# Altium PCB RaspberryPi3BP-Layout.pcbdoc
Units mil, origin at the board's own origin, x right, y up, seen from the top; angles counter-clockwise.
Board outline 5516.39 x 4732.23 mil, 2 copper layers (Top Layer, Bottom Layer); 18 components, 0 nets, 191 pads, 0 vias.
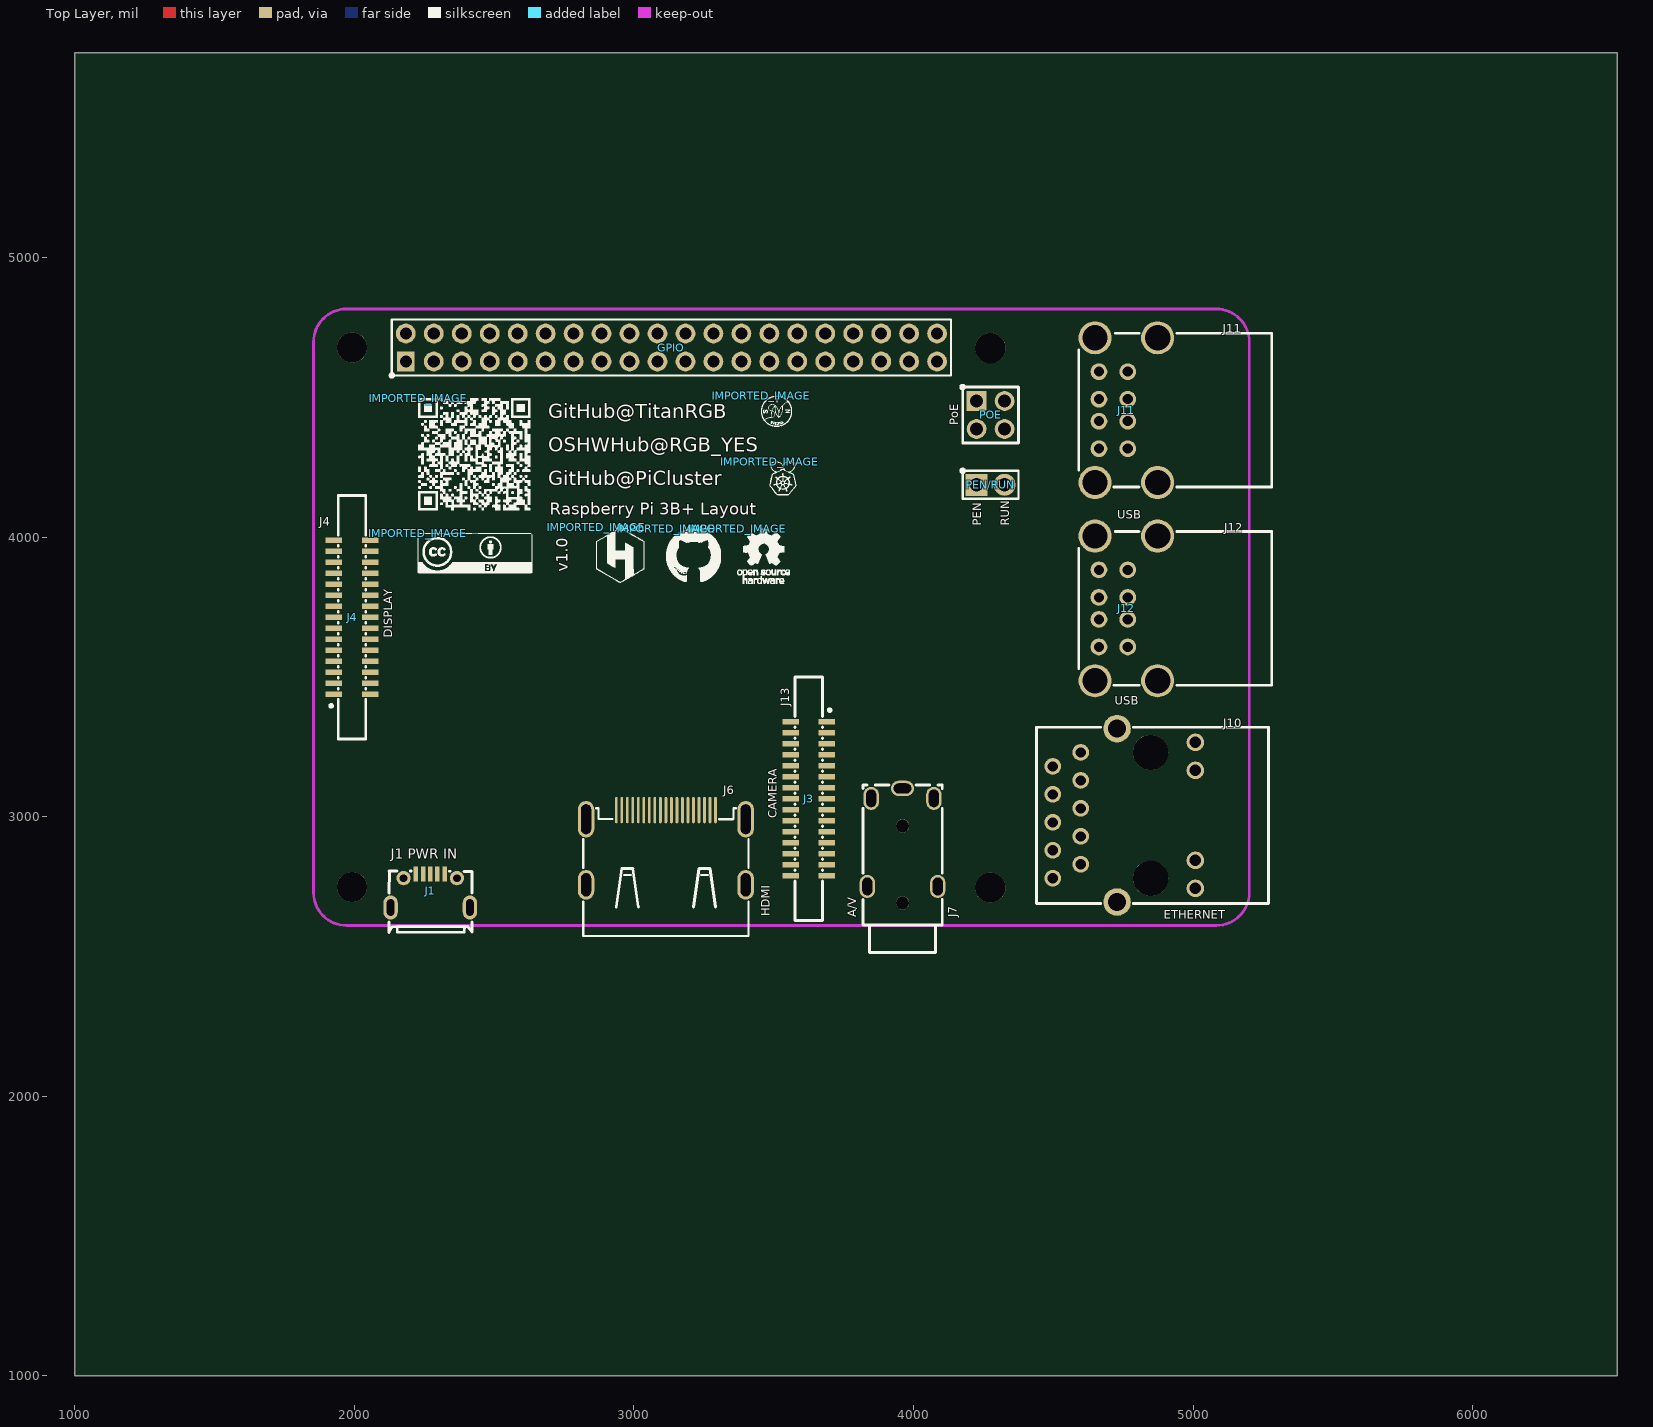
[diagram p0: Top Layer view]
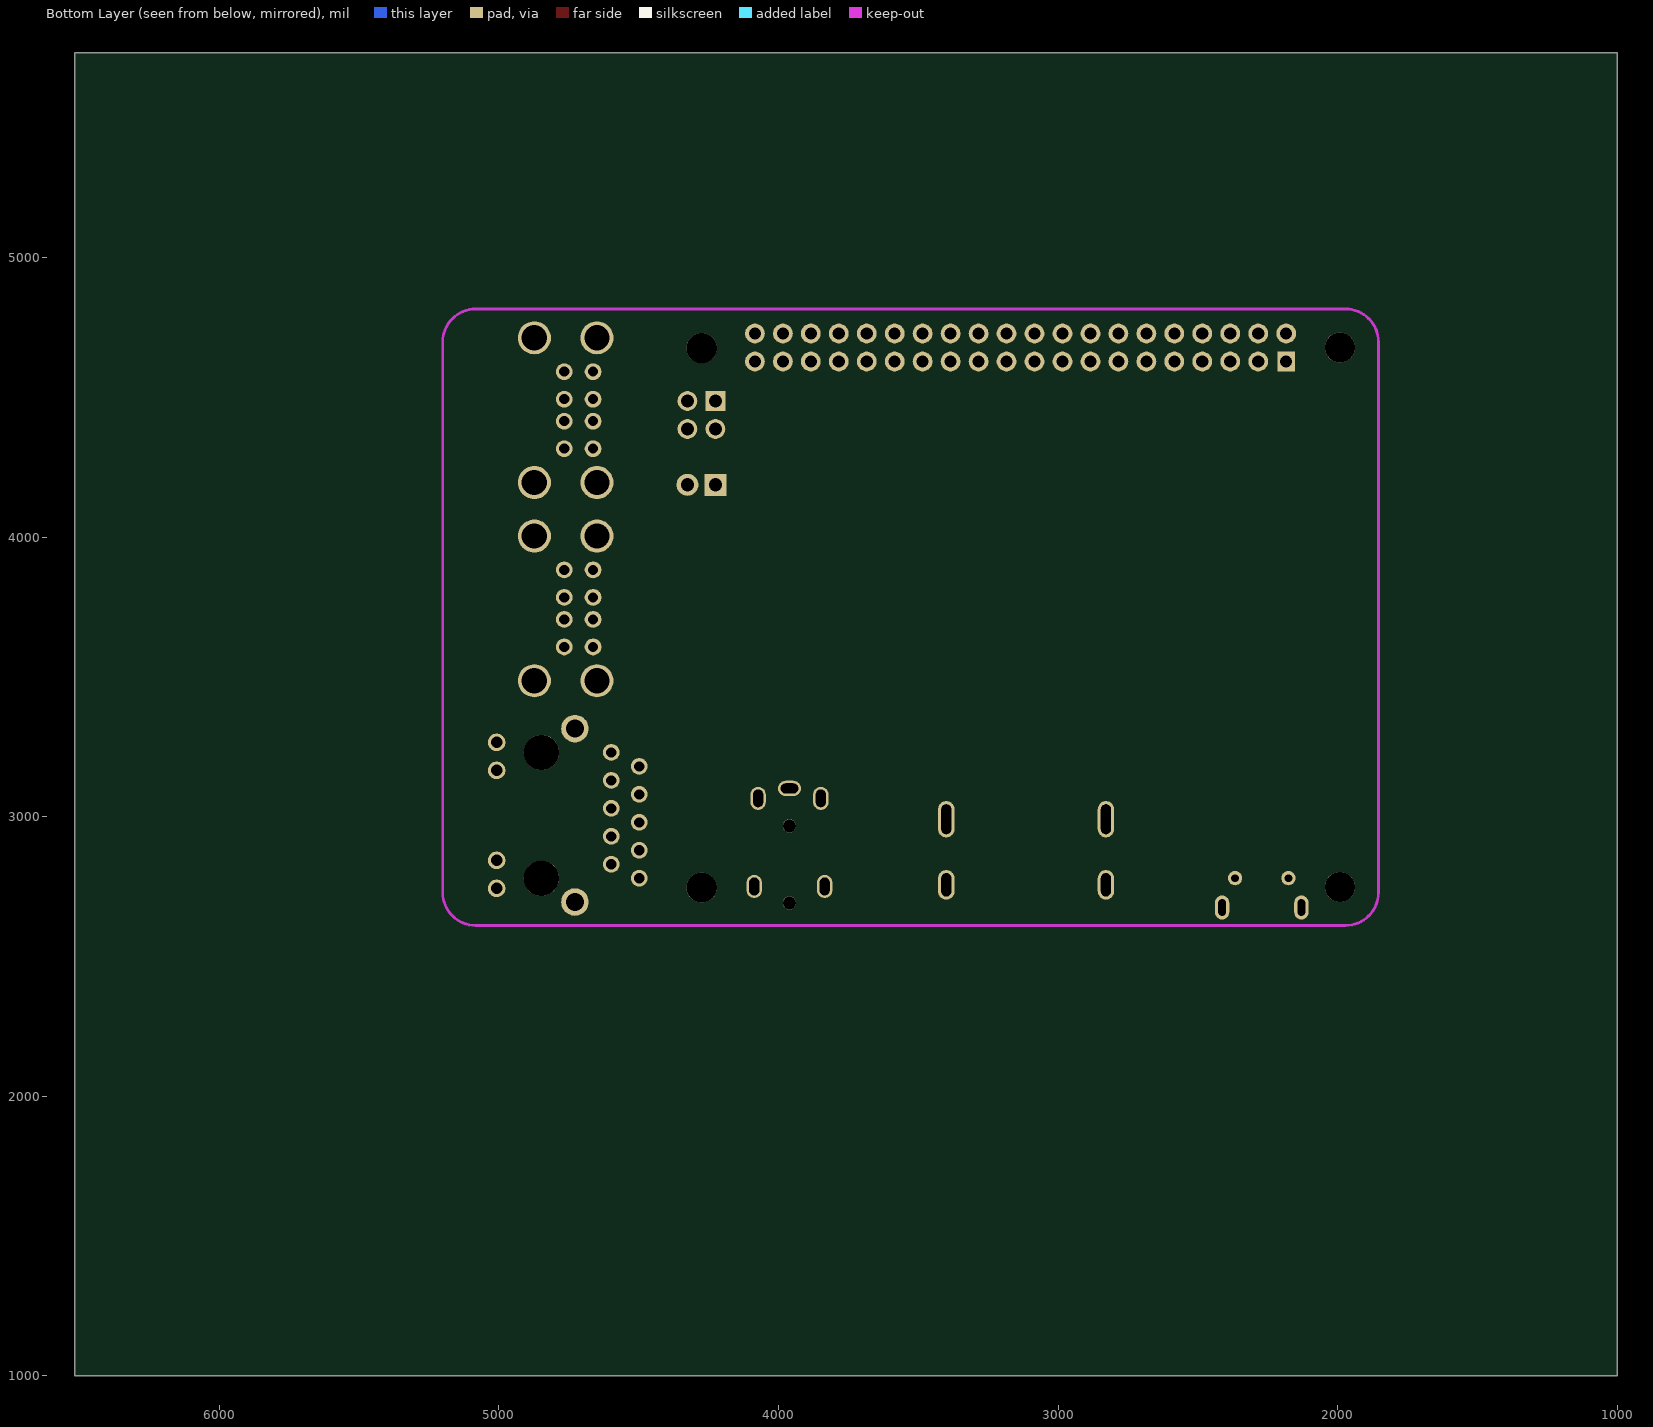
[diagram p1: Bottom Layer view, seen from below]

## Layer stack, top to bottom
Top Solder: solder mask 0.4, Solder Resist, Dk 3.5
Top Layer: signal copper 1.4
Dielectric1: dielectric 12.6, FR-4, Dk 4.8
Bottom Layer: signal copper 1.4
Bottom Solder: solder mask 0.4, Solder Resist, Dk 3.5

## Board outline
6516.39,1000 1000,1000 1000,5732.23 6516.39,5732.23
cut-out: 0,0 10,0 10,10 0,10

## Design rules (kind name [scope] priority, off if disabled: settings)
Clearance [All] p1: gap=10 ignorepadtopadclearanceinfootprint=FALSE except(0: Arc-Hole Track-Hole SMDPad-Hole THPad-Hole Via-Hole Fill-Hole Poly-Hole Region-Hole Text-Hole)
PolygonConnect [All] p1: connectstyle=Relief reliefconductorwidth=10 reliefentries=4 polygonreliefangle="90 Angle" airgapwidth=10
RoomDefinition RaspberryPi3BP-Layout [InComponentClass('RaspberryPi3BP-Layout')] p1: confinementstyle=ConfineIn formatcopy=TRUE lockcomponents=FALSE outline 0,0 2000,0 2000,1000 0,1000
RoutingVias [All] p1: holewidth=28 width=50 viastyle="Through Hole" minholewidth=28 minwidth=50 maxholewidth=28 maxwidth=50
SolderMaskExpansion [All] p1: expansion=4 istentingtop=FALSE
Width [All] p1: maxlimit=10 minlimit=10 preferedwidth=10
30 further rules are at their usual default settings.

## Classes and differential pairs
component class RaspberryPi3BP-Layout: GPIO J1 J3 J4 J6 J7 J10 J11 J12 PEN/RUN POE

## Components (designator, comment, footprint, x,y, rotation, side; value= is the part's Value field where it differs from the comment)
GPIO "Header-Male-2.54_2x20" HDR-TH_40P-P2.54-V-M-R2-C20-S2.54 3134.05,4678.01 r0 top
IMPORTED_IMAGE "Comment" IMPORTED_IMAGE 3115,4030 r0 top
IMPORTED_IMAGE "Comment" IMPORTED_IMAGE 3455,4505 r0 top
IMPORTED_IMAGE "Comment" IMPORTED_IMAGE 3485,4270 r0 top
IMPORTED_IMAGE "Comment" IMPORTED_IMAGE 2226.4,4014.07 r0 top
IMPORTED_IMAGE "Comment" IMPORTED_IMAGE 2865,4035 r0 top
IMPORTED_IMAGE "Comment" IMPORTED_IMAGE 2229.09,4495.82 r0 top
IMPORTED_IMAGE "Comment" IMPORTED_IMAGE 3370,4030 r0 top
J1 "PWR IN" MICRO-USB-SMD_MICROXNJ 2271.41,2735.27 r0 top
J3 "CAMERA" FPC-SMD_15P-P1.00_HDGC_1.0K-GT-15PB 3624.96,3064.41 r270 top
J4 "DISPLAY" FPC-SMD_15P-P1.00_HDGC_1.0K-GT-15PB 1991.84,3713.45 r90 top
J6 "HDMI" HDMI-SMD_HDMI-019S 3114.05,2890.21 r0 top
J7 "A/V" AUDIO-TH_HOOYA_PJ-322 3960.35,2926.01 r90 top
J10 "ETHERNET" RJ45-TH_XKB_X01AQ068DB2AD 4752.55,3005.09 r90 top
J11 "USB" USB-A-TH_U-USBAR04P-F201 4760.75,4453.93 r90 top
J12 "USB" USB-A-TH_U-USBAR04P-F201 4760.75,3745.03 r90 top
PEN/RUN "KH-2.54PH180-1X2P-L11.5" HDR-TH_2P-P2.54-V-M 4275.35,4187.11 r0 top
POE "210-72-02GB01" HDR-TH_4P-P2.54-V-R2-C2-S2.54_A2541WV-2X2P 4275.35,4436.71 r270 top

## Footprints (in the part's own frame and the unit in brackets; to place one, negate y for a bottom-side part, rotate by r counter-clockwise, add the part's x,y. Pads: shape width x height; smd on the part's side, far side on the other; paste and mask are expansions set on the pad)
AUDIO-TH_HOOYA_PJ-322 [mm]
  oval 1.4x2.1 hole 0.9 slot 1.6 at 90 deg: 1(4.45,0)
  oval 2.1x1.4 hole 0.9 slot 1.6 at 0 deg: 2(3.55,2.85) 3(-4.45,-3.2) 3(-4.45,3.2) 4(3.55,-2.85)
  round 1.2 hole 1.2 unplated: ""(-5.95,0) ""(1.05,0)
  silkscreen extent -10.45,-3.6 4.75,3.6
FPC-SMD_15P-P1.00_HDGC_1.0K-GT-15PB [mm]
  rect 0.5x1.5 smd: 1(-7,-1.65) 1(-7,1.65) 2(-6,-1.65) 2(-6,1.65) 3(-5,-1.65) 3(-5,1.65) 4(-4,-1.65) 4(-4,1.65) 5(-3,1.65) 5(-3,-1.65) 6(-2,1.65) 6(-2,-1.65) 7(-1,1.65) 7(-1,-1.65) 8(0,1.65) 8(0,-1.65) 9(1,1.65) 9(1,-1.65) 10(2,1.65) 10(2,-1.65) 11(3,1.65) 11(3,-1.65) 12(4,-1.65) 12(4,1.65) 13(5,-1.65) 13(5,1.65) 14(6,-1.65) 14(6,1.65) 15(7,-1.65) 15(7,1.65)
  silkscreen extent -11.05,-1.25 11.05,2.03
HDMI-SMD_HDMI-019S [mm]
  oval 0.25x2.4 smd: 1(4.501,3.396) 2(4.001,3.396) 3(3.501,3.396) 4(3.001,3.396) 5(2.5,3.396) 6(2,3.396) 7(1.5,3.396) 8(1,3.396) 9(0.5,3.396) 10(0,3.396) 11(-0.5,3.396) 12(-1,3.396) 13(-1.5,3.396) 14(-2,3.396) 15(-2.5,3.396) 16(-3.001,3.396) 17(-3.501,3.396) 18(-4.001,3.396) 19(-4.501,3.396)
  oval 1.5x2.7 hole 0.9 slot 2.1 at 90 deg: 20(7.251,-3.397) 21(-7.251,-3.397)
  oval 1.5x3.3 hole 0.9 slot 2.7 at 90 deg: 22(7.251,2.563) 23(-7.251,2.563)
  silkscreen extent -7.5,-8.04 7.5,3.56
HDR-TH_2P-P2.54-V-M [mm]
  rect 2x2 hole 1.2: 1(-1.27,0)
  round 2 hole 1.2: 2(1.27,0)
  silkscreen extent -2.54,-1.27 2.54,1.27
HDR-TH_4P-P2.54-V-R2-C2-S2.54_A2541WV-2X2P [mm]
  rect 1.8x1.8 hole 1.2: 1(-1.27,-1.27)
  round 1.8 hole 1.2: 2(-1.27,1.27) 3(1.27,-1.27) 4(1.27,1.27)
  silkscreen extent -2.54,-2.54 2.54,2.54
HDR-TH_40P-P2.54-V-M-R2-C20-S2.54 [mm]
  rect 1.575x1.8 hole 1.1: 1(-24.13,-1.27)
  round 1.8 hole 1.1: 2(-24.13,1.27) 3(-21.59,-1.27) 4(-21.59,1.27) 5(-19.05,-1.27) 6(-19.05,1.27) 7(-16.51,-1.27) 8(-16.51,1.27) 9(-13.97,-1.27) 10(-13.97,1.27) 11(-11.43,-1.27) 12(-11.43,1.27) 13(-8.89,-1.27) 14(-8.89,1.27) 15(-6.35,-1.27) 16(-6.35,1.27) 17(-3.81,-1.27) 18(-3.81,1.27) 19(-1.27,-1.27) 20(-1.27,1.27) 21(1.27,-1.27) 22(1.27,1.27) 23(3.81,-1.27) 24(3.81,1.27) 25(6.35,-1.27) 26(6.35,1.27) 27(8.89,-1.27) 28(8.89,1.27) 29(11.43,-1.27) 30(11.43,1.27) 31(13.97,-1.27) 32(13.97,1.27) 33(16.51,-1.27) 34(16.51,1.27) 35(19.05,-1.27) 36(19.05,1.27) 37(21.59,-1.27) 38(21.59,1.27) 39(24.13,-1.27) 40(24.13,1.27)
  silkscreen extent -25.4,-2.54 25.4,2.54
IMPORTED_IMAGE [mil]
  silkscreen extent 0,-190 196,0
MICRO-USB-SMD_MICROXNJ [mm]
  rect 0.4x1.4 smd: 1(-1.3,1.521) 2(-0.65,1.521) 3(0,1.521) 4(0.65,1.521) 5(1.3,1.521)
  round 1.3 hole 0.7: 6(2.425,1.149) 9(-2.425,1.149)
  oval 1.3x2.2 hole 0.7 slot 1.5 at 90 deg: 7(3.6,-1.521) 8(-3.6,-1.521)
  silkscreen extent -3.76,-3.78 3.8,1.79
RJ45-TH_XKB_X01AQ068DB2AD [mil]
  round 60 hole 36: 1(-225,254.92) 2(-175,154.92) 3(-125,254.92) 4(-75,154.92) 5(-25,254.92) 6(25,154.92) 7(75,254.92) 8(125,154.92) 9(175,254.92) 10(225,154.92)
  round 62.99 hole 40.16: 11(-261.02,-254.92) 12(-161.03,-254.92) 13(161.02,-254.92) 14(261.02,-254.92)
  round 98.42 hole 64.96: 15(-310.03,25) 16(310.04,25)
  round 125.98 hole 125.98 unplated: ""(-225,-95.08) ""(225,-95.08)
  silkscreen extent -315,-517 315,313
USB-A-TH_U-USBAR04P-F201 [mm]
  round 1.524 hole 0.914: 1(-3.5,2.49) 2(-1,2.49) 3(1,2.49) 4(3.5,2.49) 5(-3.5,-0.13) 6(-1,-0.13) 7(1,-0.13) 8(3.5,-0.13)
  round 3 hole 2.3: 9(-6.57,-2.84) 9(-6.57,2.84) 9(6.57,-2.84) 9(6.57,2.84)
  silkscreen extent -6.98,-13.21 6.99,4.32

## Free pads (board coordinates)
  round 108.27 hole 108.27 unplated: 1(1991.88,2748.89) 1(1991.88,4678.02) 1(4274.09,2746.68) 1(4274.09,4675.82)

## Nets (pads, with @x,y where several pads share a name; then routed paths per layer and width w, separated by ;. In a path a pad name is that pad's centre, name@x,y a point inside that pad or via, vN(x,y) a via of type N, cw(c..) or ccw(c..) an arc to the next point about the centre after c; other vN are vias at no path point)
pads on no net: GPIO.1 GPIO.2 GPIO.3 GPIO.4 GPIO.5 GPIO.6 GPIO.7 GPIO.8 GPIO.9 GPIO.10 GPIO.11 GPIO.12 GPIO.13 GPIO.14 GPIO.15 GPIO.16 GPIO.17 GPIO.18 GPIO.19 GPIO.20 GPIO.21 GPIO.22 GPIO.23 GPIO.24 GPIO.25 GPIO.26 GPIO.27 GPIO.28 GPIO.29 GPIO.30 GPIO.31 GPIO.32 GPIO.33 GPIO.34 GPIO.35 GPIO.36 GPIO.37 GPIO.38 GPIO.39 GPIO.40 J1.1 J1.2 J1.3 J1.4 J1.5 J1.6 J1.7 J1.8 J1.9 J3.1 J3.2 J3.3 J3.4 J3.5 J3.6 J3.7 J3.8 J3.9 J3.10 J3.11 J3.12 J3.13 J3.14 J3.15 J4.1 J4.2 J4.3 J4.4 J4.5 J4.6 J4.7 J4.8 J4.9 J4.10 J4.11 J4.12 J4.13 J4.14 J4.15 J6.1 J6.2 J6.3 J6.4 J6.5 J6.6 J6.7 J6.8 J6.9 J6.10 J6.11 J6.12 J6.13 J6.14 J6.15 J6.16 J6.17 J6.18 J6.19 J6.20 J6.21 J6.22 J6.23 J7. J7.1 J7.2 J7.3 J7.4 J10. J10.1 J10.2 J10.3 J10.4 J10.5 J10.6 J10.7 J10.8 J10.9 J10.10 J10.11 J10.12 J10.13 J10.14 J10.15 J10.16 J11.1 J11.2 J11.3 J11.4 J11.5 J11.6 J11.7 J11.8 J11.9 J12.1 J12.2 J12.3 J12.4 J12.5 J12.6 J12.7 J12.8 J12.9 PEN/RUN.1 PEN/RUN.2 POE.1 POE.2 POE.3 POE.4

## Keep-outs
Keep-Out Layer:
  lines w10: 1854.09,2729.2 ccw(c1972.2,2729.2) 1972.2,2611.09 ; 1854.09,4697.71 cw(c1972.2,4697.71) 1972.2,4815.82 ; 5082.43,2611.09 ccw(c5082.43,2729.2) 5200.54,2729.2 ; 5082.43,4815.82 cw(c5082.43,4697.71) 5200.54,4697.71

## Silkscreen, mask and mechanical layers (free items; w line width, h text height)
Top Overlay:
  circle w8: c4175.35,4237.08 r7.69
  circle w8: c4175.35,4536.69 r7.69
  circle w8: c4175.35,4536.69 r7.69
  circle w8: c2134.09,4578.02 r7.69
  text "J11" at 5105,4730 h30
  text "GitHub@TitanRGB" at 2694.09,4425.8 h51.18
  text "PoE" at 4160,4400 h30 r90
  text "OSHWHub@RGB_YES" at 2694.09,4305.8 h51.18
  text "GitHub@PiCluster" at 2694.09,4185.8 h51.18
  text "Raspberry Pi 3B+ Layout" at 2699.09,4079.73 h43.31
  text "USB" at 4727.55,4065.11 h30
  text "J4" at 1875,4040 h30
  text "PEN" at 4242.55,4040.11 h30 r90
  text "RUN" at 4342.55,4040.11 h30 r90
  text "J12" at 5110,4020 h30
  text "v1.0" at 2763.19,3876.81 h40 r90
  text "DISPLAY" at 2135,3640 h30 r90
  text "USB" at 4720,3400 h30
  text "J13" at 3555,3395 h30 r90
  text "CAMERA" at 3510,2995 h30 r90
  text "J1 PWR IN" at 2130,2850 h35
  text "HDMI" at 3485,2645 h30 r90
  text "A/V" at 3795,2640 h30 r90
  text "ETHERNET" at 4895,2635 h30